# Altium PCB AMDDSP.PcbDoc (part 3 of 3)
Units mil, origin at the board's own origin, x right, y up, seen from the top; angles counter-clockwise.
Board outline 4736.22 x 5330.71 mil, 4 copper layers (Top Layer, GND, PWR, Bottom Layer); 286 components, 168 nets, 1027 pads, 408 vias.
Unrouted connection lines stored in the file: 126.
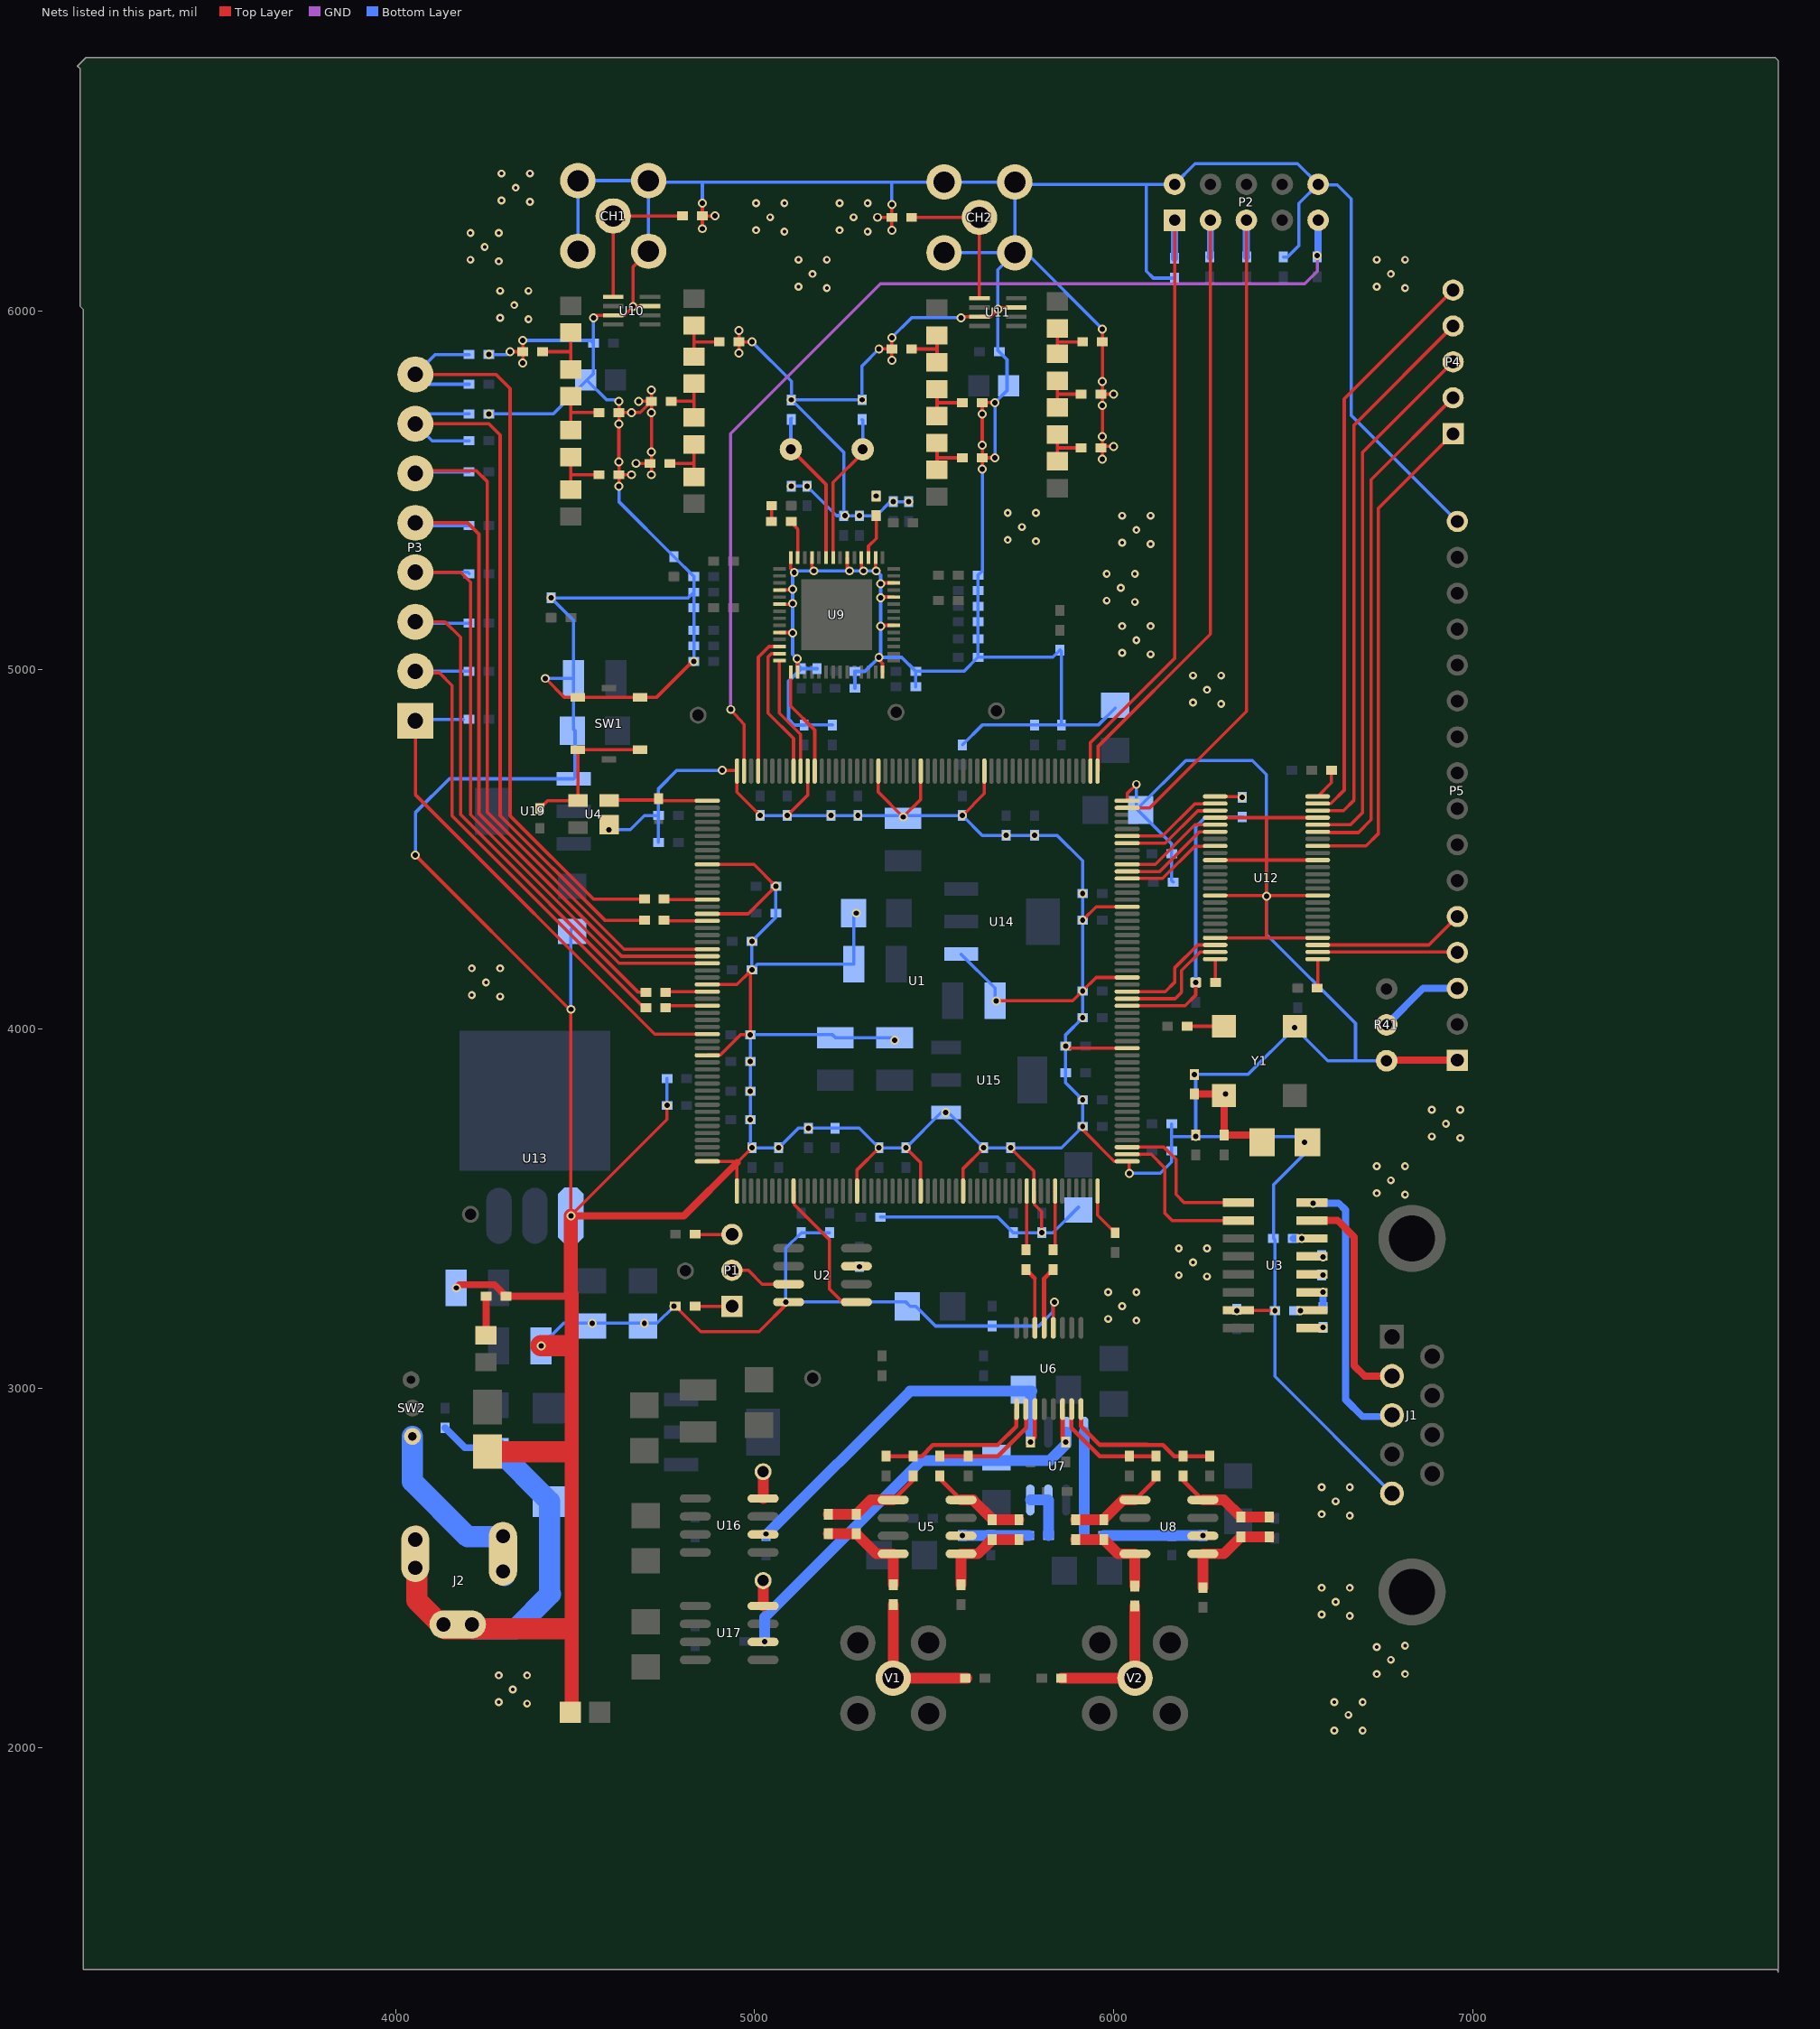
[diagram p5: the nets of this part, all layers, seen from the top]

## Via types
v1: diameter 25, hole 15, Top Layer to Bottom Layer, tented both sides, 261 vias
v2: diameter 22, hole 10, Top Layer to Bottom Layer, tented bottom, 125 vias
v3: diameter 25.98, hole 12.99, Top Layer to Bottom Layer, tented top, 16 vias
v4: diameter 157.48, hole 118.11, Top Layer to Bottom Layer, tented both sides, 4 vias
v5: diameter 39.37, hole 23.62, Top Layer to Bottom Layer, tented both sides, 1 vias
v6: diameter 25, hole 15, Top Layer to Bottom Layer, tented bottom, 1 vias

## Nets (pads, with @x,y where several pads share a name; then routed paths per layer and width w, separated by ;. In a path a pad name is that pad's centre, name@x,y a point inside that pad or via, vN(x,y) a via of type N, cw(c..) or ccw(c..) an arc to the next point about the centre after c; other vN are vias at no path point) (continued)
GND: C1.2 C2.2 C3.2 C4.2 C5.2 C8.2 C9.1 C12.2 C16.2 C18.2 C19.2 C20.2 C21.2 C22.2 C23.2 C24.2 C25.2 C26.2 C27.2 C28.2 C29.2 C30.2 C31.2 C32.2 C33.2 C34.2 C35.2 C36.2 C37.2 C38.2 C40.1 C41.2 C42.2 C43.2 C44.2 C46.2 C47.2 C48.2 C49.2 C50.2 C51.2 C52.2 C53.2 C54.2 C55.2 C56.2 C57.2 C58.2 C59.2 C60.2 C67.2 C68.1 C69.1 C70.1 C71.1 C72.2 C73.2 C74.2 C75.1 C76.1 C77.1 C78.1 C79.1 C80.1 C81.1 C82.1 C83.1 C84.1 C85.1 C86.2 C87.2 C88.2 C90.1 C91.1 C92.1 C93.1 C94.1 C95.1 C96.1 C97.1 C98.1 C99.1 C100.1 C112.2 C113.1 C114.1 C115.1 C116.1 C117.1 C118.1 C119.1 C120.1 C121.1 C122.1 C123.1 C124.1 C125.1 C126.1 C127.1 C128.1 C129.2 C130.2 C131.2 C136.1 C137.1 C138.1 C139.1 C140.1 C141.1 C142.1 C143.1 C144.2 C145.2 C146.2 C162.2 C163.2 C164.2 C165.2 C166.2 C167.2 C168.2 C169.2 CH1.2 CH2.2 D2.1 J1.5 J2.2 J2.2A J2.2B J2.3 J2.3A J2.3B P2.2 P2.10 P5.1 P5.16 R7.1 R8.2 R30.2 R32.2 R33.2 R41.1 R42.1 R43.2 R52.2 R53.2 SW1.B SW1.BB U1.10 U1.17 U1.27 U1.37 U1.52 U1.53 U1.70 U1.79 U1.85 U1.95 U1.105 U1.121 U1.131 U1.141 U1.156 U1.173 U1.182 U1.188 U1.198 U1.208 U2.4 U3.15 U4.1 U6.12 U9.6 U9.10 U9.12 U9.16 U9.18 U9.20 U9.25 U9.28 U9.32 U9.34 U9.38 U9.44 U9.56 U10.3 U10.7 U11.3 U11.7 U12.4 U12.10 U12.15 U12.21 U12.28 U12.34 U12.39 U12.45 U13.1 U14.1 U15.1 U19.1 Y1.2 | length 39700.4
  Top Layer w9: v1(4055.12,4484.25) 4484.25,4055.12 v1(4488.19,4055.12) v1(4488.19,3480.32) 4755.91,3748.03 v1(4755.91,3787.4) ; v1(4318.9,5885.83) C57.2@4354.33,5885.83 ; v1(4354.33,5854.33) C57.2@4354.33,5885.83 ; v1(4354.33,5917.32) C57.2@4354.33,5885.83 ; C57.2@4354.45,5885.83 C57.2@4354.33,5885.83 ; v6(4417.32,4976.38) 4470.48,4923.22 SW1.B@4507.88,4923.22 SW1.BB@4681.1,4923.22 4726.37,4923.22 4826.77,5023.62 v1(4830.71,5023.62) ; v1(4551.18,5980.31) 4558.07,5987.2 U10.3@4606.3,5987.2 4636.81,5987.2 v1(4661.42,6011.81) ; C55.2@4621.93,5543.31 C55.2@4622.05,5543.31 ; v1@4621.93,5578.74 4621.93,5685.04 4622.05,5685.16 C56.2@4622.05,5716.54 ; v1(4622.05,5511.81) C55.2@4622.05,5543.31 ; v1(4622.05,5578.74) C55.2@4622.05,5543.31 ; v1(4622.05,5748.03) C56.2@4622.05,5716.54 ; v1(4657.48,5543.31) C55.2@4622.05,5543.31 ; v1(4669.29,5574.8) C49.2@4708.78,5574.8 ; v1(4677.17,5748.03) C50.2@4712.72,5748.03 ; CH1.2@4704.72,6165.35 4661.42,6122.05 v1(4661.42,6011.81) ; U10.7@4708.66,6012.8 4662.4,6012.8 v1(4661.42,6011.81) ; v1(4712.6,5543.31) v1(4712.6,5606.3) ; v1(4712.6,5779.53) 4712.72,5779.41 C50.2@4712.72,5748.03 ; v1@4712.72,5606.3 C50.2@4712.72,5748.03 ; R7.1@4779.53,3228.35 4850.39,3157.48 5011.81,3157.48 5094.29,3239.96 U2.4@5094.49,3239.96 ; R32.2@4854.21,6263.78 v1(4889.76,6263.78) ; v1(4854.33,6228.35) v1(4854.33,6299.21) ; U1.52@4868.11,3631.89 4954.72,3631.89 ; U1.37@4868.11,3927.17 4869.52,3928.57 4905.21,3928.57 4960.89,3984.25 v1(4988.19,3984.25) v1@4988.19,4161.42 ; U1.27@4868.11,4124.02 4950.79,4124.02 v1@4988.19,4161.42 ; U1.17@4868.11,4320.87 4982.28,4320.87 v1(5059.06,4397.64) 4998.03,4458.66 U1.10@4868.11,4458.66 ; v1(4909.45,4720.47) 4948.82,4720.47 U1.208@4950.79,4718.5 4950.79,4659.45 v1(5015.75,4594.49) ; U1.53@4950.79,3549.21 4950.79,3627.95 4954.72,3631.89 ; C51.2@4956.57,5913.39 C51.2@4956.69,5913.39 ; v1(4956.69,5881.89) C51.2@4956.69,5913.39 ; v1(4956.69,5944.88) C51.2@4956.69,5913.39 ; v1(4992.13,3669.29) 4954.72,3631.89 ; v1(4992.13,4165.35) v1@4988.19,4161.42 ; v1(4992.13,5913.39) C51.2@4956.69,5913.39 ; U9.34@5068.9,5183.07 v1@5104.33,5183.07 ; U9.32@5068.9,5222.44 v1@5104.33,5222.44 ; v1(5090.55,4594.49) 5147.64,4651.57 U1.198@5147.64,4718.5 ; U9.28@5100.39,5312.99 5100.39,5281.5 v1@5110.23,5271.66 ; v1@5110.24,5267.72 v1@5110.24,5271.65 ; U9.25@5159.45,5312.99 5159.45,5281.5 v1(5165.35,5275.59) ; U9.20@5257.87,5312.99 5257.87,5281.5 v1(5263.78,5275.59) ; U1.70@5285.43,3549.21 5285.43,3608.27 v1(5346.46,3669.29) ; U9.18@5297.24,5312.99 5297.24,5281.5 v1(5303.15,5275.59) ; v1@5336.61,5277.56 U9.16@5336.61,5312.99 ; v1(5342.52,6259.84) R33.2@5381.89,6259.84 ; U1.188@5344.49,4718.5 5344.49,4659.45 v1(5413.39,4590.55) 5462.6,4639.76 U1.182@5462.6,4718.5 ; v1(5346.46,5893.7) C60.2@5381.89,5893.7 ; v1(5381.89,5862.2) C60.2@5381.89,5893.7 ; v1(5381.89,5925.2) C60.2@5381.89,5893.7 ; v1(5381.89,6224.41) R33.2@5381.89,6259.84 ; v1(5381.89,6295.28) R33.2@5381.89,6259.84 ; C60.2@5382.01,5893.7 C60.2@5381.89,5893.7 ; R33.2@5382.01,6259.84 R33.2@5381.89,6259.84 ; v1(5421.26,3669.29) 5462.6,3627.95 U1.79@5462.6,3549.21 ; v1(5578.74,4594.49) 5639.76,4655.51 U1.173@5639.76,4718.5 ; U1.85@5580.71,3549.21 5580.71,3612.2 v1(5637.8,3669.29) ; C58.2@5633.74,5590.55 C58.2@5633.86,5590.55 ; v1@5633.74,5625.98 C59.2@5633.74,5744.09 v1(5669.29,5744.09) ; v1(5633.86,5559.06) C58.2@5633.86,5590.55 ; v1(5633.86,5625.98) C58.2@5633.86,5590.55 ; v1(5669.29,5590.55) C58.2@5633.86,5590.55 ; v1(5673.23,4078.74) 5885.83,4078.74 v1(5913.39,4106.3) 5950.79,4143.7 U1.131@6037.4,4143.7 ; v1(5712.6,3669.29) 5777.56,3604.33 U1.95@5777.56,3549.21 5778.96,3547.81 5778.96,3512.11 5799.21,3491.87 v1(5799.21,3433.07) ; U6.12@5831.69,3168.31 5831.69,3237.2 v1(5834.65,3240.16) ; v1(5866.14,3952.76) 5872.05,3946.85 U1.121@6037.4,3946.85 ; v1(5913.39,3728.35) 5913.39,3720.21 6001.71,3631.89 U1.105@6037.4,3631.89 ; v1(5913.39,4303.15) 5950.79,4340.55 U1.141@6037.4,4340.55 ; C52.2@5964.45,5622.05 C52.2@5968.5,5622.05 ; C53.2@5964.45,5767.72 C53.2@5968.39,5767.72 ; v1@5968.39,5657.48 C53.2@5968.39,5767.72 ; v1@5968.5,5590.55 C52.2@5968.5,5622.05 ; v1(5968.5,5649.61) C52.2@5968.5,5622.05 ; v1(5968.5,5948.82) 5968.5,5913.5 C54.2@5968.39,5913.39 C53.2@5968.39,5767.72 ; v1(6000,5622.05) C52.2@5968.5,5622.05 ; v1(6000,5767.72) C53.2@5968.39,5767.72 ; U1.156@6037.4,4635.83 6037.4,4655.51 v1(6062.99,4681.1) ; v1(6043.31,3598.43) U1.105@6043.31,3625.98 ; U12.45@6282.48,4253.94 6425.18,4253.94 ; U12.39@6282.48,4372.05 v1@6425.18,4372.05 ; U12.34@6282.48,4470.47 6425.18,4470.47 ; U12.28@6282.48,4588.58 6425.2,4588.58 U12.21@6567.91,4588.58 ; U3.15@6346.85,3217.2 6448.15,3217.2 v1(6448.82,3216.54) ; 6425.18,4588.57 6425.18,4470.47 ; U12.4@6567.91,4253.94 6425.18,4253.94 ; U12.10@6567.91,4372.05 v1@6425.18,4372.05 ; U12.15@6567.91,4470.47 6425.18,4470.47 ; C56.2@4622.05,5716.54 4681.22,5716.54 C50.2@4712.72,5748.03 ; v1@5110.23,5271.66 5110.23,5275.07 v1@5110.24,5271.65 ; 6425.18,4253.94 v1@6425.18,4372.05 ; v1@6425.18,4372.05 6425.18,4470.47
  Top Layer w10: U9.38@5068.9,5104.33 v1@5104.33,5104.33 ; U9.44@5120.08,4994.09 v1@5120.08,5029.53 ; v1@5346.46,5027.56 5356.08,5017.94 5356.08,5002.21 5356.3,5001.99 U9.56@5356.3,4994.09 ; v1@5352.36,5124.02 U9.6@5387.8,5124.02 ; v1@5352.36,5202.76 U9.10@5387.8,5202.76 ; v1@5352.36,5242.13 U9.12@5387.8,5242.13 ; v1@5573.82,5983.27 U11.3@5625.98,5983.27 ; U11.3@5633.86,5983.27 U11.3@5625.98,5983.27 ; v1@5676.95,6004.16 5657.04,5984.25 5626.97,5984.25 U11.3@5625.98,5983.27 ; v1@5680.66,6007.87 U11.7@5728.35,6007.87
  Top Layer w19.68: v1(4169.29,3279.53) 4178.01,3288.25 4275.31,3288.25 4307.09,3256.47 R42.1@4307.09,3255.91 4480.31,3255.91 4488.19,3263.78 ; R41.1@6759.84,3911.81 6761.42,3913.39 P5.1@6956.69,3913.39
  Top Layer w20: v1(4488.19,3480.32) 4803.15,3480.32 4950.79,3627.95
  Top Layer w39.37: 4488.19,3263.78 v1(4488.19,3480.32) ; R43.2@4490.16,2098.43 4490.16,3261.81
  Top Layer w59.06: J2.2B@4059.06,2587.6 J2.2B@4059.06,2566.93 ; D2.1@4255.91,2823.82 4467.52,2823.82 4468.5,2822.83 ; v1(4405.51,3118.11) 4468.5,3118.11 ; 4476.38,2330.71 4216.54,2330.71 4177.17,2330.71 4137.8,2330.71 4059.06,2409.45 4059.06,2488.19 J2.2A@4059.06,2527.56 ; J2.2A@4059.06,2527.56 J2.2B@4059.06,2566.93 ; J2.2A@4059.06,2527.56 J2.2B@4059.06,2566.93
  Bottom Layer w9: v1(4055.12,4484.25) 4055.12,4602.36 4149.61,4696.85 U19.1@4496.06,4696.85 4500,4700.79 4500,4830.71 4496.06,4834.65 C169.2@4496.06,4976.38 ; R53.2@4259.72,5712.6 v1(4259.84,5712.6) 4438.98,5712.6 C166.2@4533.46,5807.09 ; R52.2@4259.72,5877.95 v1(4259.84,5877.95) 4311.02,5877.95 v1(4318.9,5885.83) ; v1(4354.33,5917.32) 4543.43,5917.32 C165.2@4551.3,5909.45 ; v1(4405.51,3118.11) 4468.5,3181.1 v1(4547.24,3181.1) 4688.98,3181.1 v1(4692.91,3181.1) 4728.35,3181.1 v1(4775.59,3228.35) ; v6(4417.32,4976.38) C169.2@4496.06,4976.38 ; v1(4488.19,4055.12) 4488.19,4275.59 C167.2@4492.13,4279.53 ; CH1.2@4507.87,6165.35 CH1.2@4507.87,6362.2 CH1.2@4704.72,6362.2 ; v1(4551.18,5980.31) 4551.3,5980.2 C165.2@4551.3,5909.45 ; v1(4594.49,4555.12) 4653.54,4555.12 4692.91,4594.49 C114.1@4732.28,4594.49 ; v1(4622.05,5511.81) 4622.05,5468.39 C43.2@4775.59,5314.84 4775.83,5314.84 C33.2@4830.83,5259.84 C32.2@4830.83,5216.54 ; v1(4622.05,5748.03) 4618.11,5751.97 4587.76,5751.97 4533.46,5806.27 C166.2@4533.46,5807.09 ; CH1.2@4704.72,6165.35 CH1.2@4704.72,6362.2 ; C113.1@4732.28,4519.69 C114.1@4732.28,4594.49 ; v1(4755.91,3787.4) C115.1@4755.91,3862.2 ; C29.2@4830.83,5023.62 C28.2@4830.83,5066.93 C30.2@4830.83,5110.24 C31.2@4830.83,5173.23 C32.2@4830.83,5216.54 ; v1(4854.33,6299.21) 4854.33,6358.27 ; v1(4909.45,4720.47) 4783.46,4720.47 4732.28,4669.29 C114.1@4732.28,4594.49 ; v1(4992.13,5913.39) 5102.36,5803.15 v1(5102.36,5751.97) C48.2@5102.36,5751.85 ; v1(5015.75,4594.49) v1(5090.55,4594.49) v1(5212.6,4594.49) v1(5287.4,4594.49) 5405.51,4594.49 C129.2@5413.39,4586.61 5421.26,4594.49 v1(5578.74,4594.49) 5633.86,4539.37 5842.52,4539.37 5913.39,4468.5 v1(5913.39,4031.5) 5866.14,3984.25 5866.14,3850.39 v1(5913.39,3803.15) v1(5913.39,3728.35) 5854.33,3669.29 v1(5637.8,3669.29) 5538.98,3768.11 5520.08,3768.11 v1(5421.26,3669.29) v1(5346.46,3669.29) 5291.34,3724.41 5122.05,3724.41 v1(5066.93,3669.29) v1(4992.13,3669.29) 4988.19,3673.23 v1(4988.19,3748.03) v1(4988.19,3826.77) v1(4988.19,3909.45) v1(4988.19,3984.25) 5216.54,3984.25 C145.2@5224.41,3976.38 C146.2@5389.76,3976.38 ; v1(5059.06,4397.64) C136.1@5059.06,4322.83 5059.06,4311.02 v1(4992.13,4244.09) v1(4992.13,4165.35) 5007.87,4181.1 C131.2@5275.59,4181.1 5275.59,4314.96 v1(5283.46,4322.83) ; C35.2@5102.36,5511.69 C34.2@5145.67,5511.69 5228.35,5429.02 ; C127.1@5137.8,4846.46 C128.1@5216.54,4846.46 ; C117.1@5208.66,3433.07 C118.1@5129.92,3433.07 5086.61,3389.76 v1(5086.61,3240.16) 5421.26,3240.16 5433.07,3228.35 5448.82,3228.35 5503.94,3173.23 C85.1@5661.42,3173.23 5791.34,3173.23 5830.71,3212.6 5830.71,3236.22 v1(5834.65,3240.16) ; C37.2@5291.34,5429.02 C36.2@5248.03,5429.02 5248.03,5606.18 C48.2@5102.36,5751.85 ; C37.2@5291.57,5429.25 R30.2@5338.58,5429.25 C38.2@5377.72,5468.39 ; v1(5346.46,5893.7) 5299.21,5846.46 v1(5299.21,5751.97) 5102.48,5751.97 C48.2@5102.36,5751.85 ; C1.2@5350.28,3476.38 5677.17,3476.38 C119.1@5720.47,3433.07 v1(5799.21,3433.07) 5830.71,3433.07 C73.2@5901.57,3503.94 ; v1(5381.89,5925.2) 5437.01,5980.31 v1(5574.8,5980.31) ; v1(5381.89,6295.28) 5381.89,6358.27 ; C38.2@5385.83,5468.39 C41.2@5429.13,5468.39 ; C24.2@5448.7,4952.76 C25.2@5448.7,4996.06 5582.56,4996.06 C23.2@5621.93,5035.43 ; CH2.2@5527.56,6161.42 CH2.2@5724.41,6161.42 ; U14.1@5574.8,4208.66 5669.29,4114.17 C144.2@5669.29,4078.74 ; C95.1@5578.74,4791.34 5633.86,4846.46 C125.1@5779.53,4846.46 C126.1@5854.33,4846.46 ; v1(5633.86,5559.06) 5633.86,5275.71 C18.2@5621.93,5263.78 C19.2@5621.93,5220.47 C20.2@5621.93,5177.17 C21.2@5621.93,5133.86 C22.2@5621.93,5086.61 C23.2@5621.93,5035.43 ; v1(5669.29,5590.55) v1(5669.29,5744.09) 5702.76,5777.56 5702.76,5791.34 5702.76,5864.06 C163.2@5680.98,5885.83 5677.17,5889.65 v1(5677.17,6003.94) 5677.17,6114.17 CH2.2@5724.41,6161.42 ; v1(5968.5,5948.82) 5755.91,6161.42 CH2.2@5724.41,6161.42 ; C112.2@6003.94,4893.7 5956.69,4846.46 C126.1@5854.33,4846.46 ; v1(6043.31,3598.43) 6129.92,3598.43 6161.42,3629.92 C122.1@6161.42,3661.42 6161.42,3696.85 6165.35,3700.79 v1(6228.35,3700.79) ; v1(6062.99,4681.1) 6062.99,4614.17 C74.2@6066.93,4610.24 ; C122.1@6161.42,3665.35 C121.1@6161.42,3736.22 ; C124.1@6165.35,4409.45 6161.42,4413.39 C123.1@6161.42,4488.19 6161.42,4515.75 C74.2@6066.93,4610.24 ; R8.2@6169.29,6090.67 6110.12,6090.67 6090.55,6110.24 6090.55,6351.97 ; v1(6224.41,3874.02) 6374.02,3874.02 v1(6503.94,4003.94) 6596.06,3911.81 6669.29,3911.81 ; v1@6228.35,3870.08 v1(6228.35,3700.79) ; C100.1@6472.44,6149.61 6484.25,6149.61 6515.75,6181.1 6515.75,6298.43 P2.10@6569.29,6351.97 ; 6661.42,6086.61 6661.42,6098.41 ; R41.1@6759.84,3911.81 6669.29,3911.81 ; J1.5@6774.8,2707.09 6448.94,3032.95 C8.2@6448.94,3216.54 6448.94,3413.27 C9.1@6444.88,3417.32 6444.88,3566.93 6531.5,3653.54 v1(6531.5,3685.04) 6515.75,3700.79 v1(6228.35,3700.79) ; P5.16@6956.69,5413.39 6661.42,5708.66 6661.42,6098.41 ; C169.2@4496.06,4976.38 4496.06,5137.68 C42.2@4433.07,5200.67 4814.96,5200.67 C32.2@4830.83,5216.54 ; C166.2@4533.46,5807.09 4551.3,5824.92 C165.2@4551.3,5909.45 ; CH1.2@4704.72,6362.2 4708.66,6358.27 4854.33,6358.27 ; 4854.33,6358.27 5381.89,6358.27 ; 5381.89,6358.27 CH2.2@5527.56,6358.27 CH2.2@5724.41,6358.27 ; C23.2@5621.93,5035.43 5830.59,5035.43 C44.2@5850.39,5055.24 5854.33,5051.3 C126.1@5854.33,4846.46 ; CH2.2@5724.41,6161.42 CH2.2@5724.41,6358.27 ; CH2.2@5724.41,6358.27 5730.71,6351.97 6086.61,6351.97 6090.55,6351.97 ; C74.2@6066.93,4610.24 6066.93,4614.17 6200.79,4748.03 6385.83,4748.03 6425.2,4708.66 v1(6425.2,4370.08) 6425.2,4263.78 6673.23,4015.75 6673.23,3915.75 6669.29,3911.81 ; 6090.55,6351.97 P2.2@6169.29,6351.97 6226.77,6409.45 6511.81,6409.45 P2.10@6569.29,6351.97 ; P2.10@6569.29,6351.97 6570.87,6350.39 6622.05,6350.39 6661.42,6311.02 6661.42,6098.41
  Bottom Layer w10: C127.1@5137.8,4846.46 5110.24,4846.46 5094.49,4862.2 5094.49,4968.39 C27.2@5129.92,5003.82 ; C26.2@5173.23,5003.82 C27.2@5129.92,5003.82 ; 5228.35,5429.02 C36.2@5248.03,5429.02 ; C47.2@5279.41,4948.82 C46.2@5279.41,4996.06 5307.09,4996.06 v1(5346.46,5035.43) ; C37.2@5291.34,5429.02 C37.2@5291.57,5429.25 ; C38.2@5377.72,5468.39 C38.2@5385.83,5468.39 ; C25.2@5448.7,4996.06 5409.33,5035.43 v1(5346.46,5035.43) ; C27.2@5129.92,5003.82 5118.11,5015.63 v1(5118.11,5031.5) 5106.3,5043.31 v1(5106.3,5102.36) v1(5106.3,5185.04) v1(5106.3,5224.41) 5106.3,5263.78 5118.11,5275.59 v1(5165.35,5275.59) v1(5263.78,5275.59) v1(5303.15,5275.59) v1(5338.58,5275.59) 5350.39,5263.78 v1(5350.39,5240.16) v1(5350.39,5200.79) v1(5350.39,5122.05) 5350.39,5039.37 v1(5346.46,5035.43)
  Bottom Layer w19.68: C162.2@4137.8,2889.88 4193.03,2834.65 C67.2@4275.59,2834.65
  Bottom Layer w59.06: J2.3B@4216.54,2330.71 4334.65,2330.71 4431.1,2427.17 4429.13,2429.13 C16.2@4429.13,2684.65 4279.13,2834.65 C67.2@4275.59,2834.65
  other v1: 6342.52,3216.54 5149.61,3724.41 5531.5,3767.72 5389.76,3968.5 5913.39,4377.95 5700.79,4539.37 5779.53,4539.37 4433.07,5200.79 5110.23,5271.64 5251.97,5429.13 5291.34,5429.13 5385.83,5468.5 5429.13,5468.5 5102.36,5511.81 5145.67,5511.81 5968.5,5586.61 4622.05,5685.04 5633.86,5712.6 4657.48,5716.54 4712.6,5716.54 5968.5,5736.22 5968.5,5803.15
  other v2: 6614.17,2047.24 6692.91,2047.24 6653.54,2090.55 4366.14,2122.05 4287.4,2125.98 6614.17,2125.98 6692.91,2125.98 4326.77,2161.42 4287.4,2200.79 4366.14,2200.79 6732.28,2204.72 6811.02,2204.72 6771.65,2244.09 6732.28,2279.53 6811.02,2283.46 6657.48,2366.14 6578.74,2370.08 6618.11,2405.51 6578.74,2444.88 6657.48,2444.88 6657.48,2645.67 6578.74,2649.61 6618.11,2685.04 6578.74,2724.41 6657.48,2724.41 6062.99,3188.98 5984.25,3192.91 6023.62,3228.35 5984.25,3267.72 6062.99,3267.72 6259.84,3311.02 6181.1,3314.96 6220.47,3350.39 6181.1,3389.76 6259.84,3389.76 6811.02,3539.37 6732.28,3543.31 6771.65,3578.74 6732.28,3618.11 6811.02,3618.11 6964.57,3696.85 6885.83,3700.79 6925.2,3736.22 6885.83,3775.59 6964.57,3775.59 4291.34,4090.55 4212.6,4094.49 4251.97,4129.92 4212.6,4169.29 4291.34,4169.29 6299.21,4905.51 6220.47,4909.45 6259.84,4944.88 6220.47,4984.25 6299.21,4984.25 6102.36,5043.31 6023.62,5047.24 6062.99,5082.68 6023.62,5122.05 6102.36,5122.05 6059.06,5188.98 5980.31,5192.91 6019.69,5228.35 5980.31,5267.72 6059.06,5267.72 6102.36,5350.39 6023.62,5354.33 5783.46,5358.27 5704.72,5362.2 6062.99,5389.76 5744.09,5397.64 6023.62,5429.13 6102.36,5429.13 5704.72,5437.01 5783.46,5437.01 4370.08,5976.38 4291.34,5980.31 4330.71,6015.75 4291.34,6055.12 4370.08,6055.12 5200.79,6062.99 6811.02,6062.99 5122.05,6066.93 6732.28,6066.93 5161.42,6102.36 6771.65,6102.36 4287.4,6137.8 4208.66,6141.73 5122.05,6141.73 5200.79,6141.73 6732.28,6141.73 6811.02,6141.73 4248.03,6177.17 4208.66,6216.54 4287.4,6216.54 5082.68,6220.47 5314.96,6220.47 5003.94,6224.41 5236.22,6224.41 5043.31,6259.84 5275.59,6259.84 5003.94,6299.21 5082.68,6299.21 5236.22,6299.21 5314.96,6299.21 4374.02,6303.15 4295.28,6307.09 4334.65,6342.52 4295.28,6381.89 4374.02,6381.89
MESOUT: CH1.1 R32.1 U10.1 | length 418.3
  Top Layer w9: U10.1@4606.3,6038.39 CH1.1@4606.3,6263.78 R32.1@4799.21,6263.78
MISO: P3.3 R49.2 R55.2 | length 1515
  Top Layer w9: P3.3@4059.06,5137.8 P3.3@4055.12,5133.86 4137.8,5133.86 4181.1,5090.55 4181.1,4597.29 4676.03,4102.36 R55.2@4696.97,4102.36
  Bottom Layer w9: P3.3@4055.12,5133.86 4059.06,5129.92 R49.2@4204.84,5129.92
MOSI: P3.2 R50.2 R54.2 | length 1392.2
  Top Layer w9: P3.2@4055.12,4996.06 4059.06,4992.13 4122.05,4992.13 4157.48,4956.69 4157.48,4593.84 4692.27,4059.06 R54.2@4696.97,4059.06
  Bottom Layer w9: P3.2@4055.12,4996.06 R50.2@4204.84,4996.06
MOSI_FLASH: U1.61 U2.5 | length 405
  Top Layer w9: U1.61@5108.27,3549.21 5109.67,3547.81 5109.67,3512.11 5208.66,3413.13 5208.66,3275.59 5244.29,3239.96 U2.5@5283.46,3239.96 U2.5@5283.27,3240.16
NetC3_1: C3.1 C4.1 R2.2 Y1.4 | length 316.9
  Top Layer w20: C3.1@6224.41,3818.9 6303.15,3818.9 Y1.4@6307.09,3814.96 R2.2@6307.09,3704.61 6401.69,3704.61 C4.1@6421.26,3685.04
  other v1: 6311.02,3818.9
NetC6_1: C6.1 U3.4
  other v1: 6582.68,3314.96
NetC6_2: C6.2 U3.5
  other v1: 6582.68,3366.14
NetC7_1: C7.1 U3.3 | length 43.3
  Bottom Layer w20: C7.1@6582.68,3224.41 v1(6582.68,3267.72)
NetC7_2: C7.2 U3.1
  other v1: 6582.68,3169.29
NetC8_1: C8.1 U3.2
  other v1: 6519.69,3216.54
NetC9_2: C9.2 U3.6 | length 23.7
  Bottom Layer w20: C9.2@6499.88,3417.32 v1(6523.62,3417.32)
NetC10_1: C10.1 RS1.1 U6.1 | length 443.2
  Top Layer w11.81: C10.1@5366.14,2811.02 RS1.1@5440.94,2811.02 5465.75,2811.02 5496.66,2841.93 5677.23,2841.93 ; 5677.38,2842.74 5728.35,2893.7 U6.1@5728.35,2940.94
NetC11_1: C11.1 RS2.1 U6.2 | length 368.7
  Top Layer w11.81: RS2.1@5515.75,2811.02 5677.17,2811.02 5755.91,2889.76 5755.91,2901.82 5755.91,2907.85 5755.91,2919.91 5755.91,2925.94 5755.91,2937.99 5755.91,2963.58 5755.91,2942.91 U6.2@5754.92,2941.93
NetC13_1: C13.1 R16.2 R17.2 U5.2 | length 185.2
  Bottom Layer w30: v1(5578.74,2590.55) R17.2@5657.48,2590.55 ; R17.2@5657.48,2590.43 5763.78,2590.43 R16.2@5763.9,2590.55
NetC14_1: C14.1 RS3.1 U6.7 | length 350.9
  Top Layer w11.81: U6.7@5882.87,2941.93 5881.89,2942.91 5881.89,2956.69 5881.89,2889.76 5960.63,2811.02 RS3.1@6118.11,2811.02
NetC15_1: C15.1 RS4.1 U6.8 | length 447.1
  Top Layer w11.81: U6.8@5908.46,2941.93 U6.8@5909.45,2940.94 ; U6.8@5909.12,2944.88 5909.12,2894.03 5960.63,2842.52 6092.7,2842.52 ; 6090.55,2841.93 6137.2,2841.93 6168.1,2811.02 RS4.1@6192.91,2811.02 C15.1@6267.72,2811.02
NetC17_1: C17.1 R19.2 R20.2 U8.2 | length 295.9
  Bottom Layer w30: R19.2@5972.32,2590.55 6062.99,2590.55 ; 6043.19,2590.55 6062.99,2590.55 ; C17.1@6247.91,2590.43 C17.1@6247.97,2590.49 ; C17.1@6248.03,2590.43 C17.1@6247.97,2590.49 ; 6062.99,2590.55 6153.43,2590.55 6153.54,2590.43 6153.66,2590.55 C17.1@6247.91,2590.55 ; C17.1@6247.91,2590.55 v1(6248.03,2590.55) C17.1@6247.97,2590.49 ; C17.1@6247.91,2590.55 C17.1@6247.97,2590.49
NetC39_2: C39.2 R29.1 | length 43.4
  Top Layer w9: R29.1@5047.24,5413.39 5047.36,5413.5 C39.2@5047.36,5456.69
NetC40_2: C40.2 U9.22 Y2.2 | length 418.7
  Top Layer w9: U9.22@5218.5,5312.99 5218.5,5521.65 5300.79,5603.94 Y2.2@5300.79,5614.17
  Bottom Layer w9: C40.2@5299.21,5696.97 5300.79,5695.39 Y2.2@5300.79,5614.17
NetC48_1: C48.1 U9.23 Y2.1 | length 429.1
  Top Layer w9: Y2.1@5100.79,5614.17 5198.82,5516.14 U9.23@5198.82,5312.99
  Bottom Layer w9: Y2.1@5100.79,5614.17 5100.79,5699.21 C48.1@5102.36,5700.79
NetC49_1: C49.1 L1.2 L2.1 | length 163
  Top Layer w9: C49.1@4763.78,5574.8 4830.71,5574.8 ; 4826.77,5574.8 4830.71,5578.74 ; L1.2@4830.71,5537.4 4830.71,5578.74 ; L2.1@4830.71,5627.95 4830.71,5578.74
NetC50_1: C50.1 L2.2 L3.1 | length 159.1
  Top Layer w9: C50.1@4767.72,5748.03 4826.77,5748.03 4830.71,5744.09 ; L2.2@4830.71,5702.76 4830.71,5744.09 ; L3.1@4830.71,5797.24 4830.71,5744.09
NetC51_1: C51.1 L3.2 L4.1 | length 157.5
  Top Layer w9: L3.2@4830.71,5872.05 4830.71,5913.39 ; L4.1@4830.71,5958.66 4830.71,5913.39 ; C51.1@4901.57,5913.39 4830.71,5913.39
NetC52_1: C52.1 L5.2 L6.1 | length 143.4
  Top Layer w9: L5.2@5842.52,5580.71 5842.52,5618.11 ; L6.1@5842.52,5655.51 5842.52,5618.11 ; C52.1@5909.45,5622.05 5905.51,5618.11 5842.52,5618.11
NetC53_1: C53.1 L6.2 L7.1 | length 141.7
  Top Layer w9: L6.2@5842.52,5730.31 5842.52,5767.72 ; L7.1@5842.52,5805.12 5842.52,5767.72 ; C53.1@5909.45,5767.72 5842.52,5767.72
NetC54_1: C54.1 L7.2 L8.1 | length 141.7
  Top Layer w9: L7.2@5842.52,5879.92 5842.52,5913.39 ; L8.1@5842.52,5950.79 5842.52,5913.39 ; C54.1@5913.39,5913.39 5842.52,5913.39
NetC55_1: C55.1 L9.2 L10.1 | length 169.3
  Top Layer w9: L9.2@4488.19,5501.97 4488.19,5543.31 ; L10.1@4488.19,5592.52 4488.19,5543.31 ; C55.1@4566.93,5543.31 4488.19,5543.31
NetC56_1: C56.1 L10.2 L11.1 | length 173.2
  Top Layer w9: L10.2@4488.19,5667.32 4488.19,5716.54 ; L11.1@4488.19,5761.81 4488.19,5716.54 ; C56.1@4566.93,5716.54 4488.19,5716.54
NetC57_1: C57.1 L11.2 L12.1 | length 182.7
  Top Layer w9: C57.1@4409.45,5885.83 4484.25,5885.83 4488.19,5889.76 ; L11.2@4488.19,5836.61 4488.19,5889.76 ; L12.1@4488.19,5938.98 4488.19,5889.76
NetC58_1: C58.1 L13.2 L14.1 | length 145.7
  Top Layer w10: L13.2@5507.87,5557.09 5507.87,5590.55 ; L14.1@5507.87,5631.89 5507.87,5590.55 ; C58.1@5578.74,5590.55 5507.87,5590.55
NetC59_1: C59.1 L14.2 L15.1 | length 145.7
  Top Layer w10: L14.2@5507.87,5706.69 5507.87,5744.09 ; L15.1@5507.87,5781.5 5507.87,5744.09 ; C59.1@5578.74,5744.09 5507.87,5744.09
NetC60_1: C60.1 L15.2 L16.1 | length 145.7
  Top Layer w10: C60.1@5437.01,5893.7 5507.87,5893.7 ; L15.2@5507.87,5856.3 5507.87,5893.7 ; L16.1@5507.87,5931.1 5507.87,5893.7
NetCF1_1: CF1.1 RF1.1 RS1.2 U5.5 | length 314.9
  Top Layer w11.81: U5.5@5385.83,2689.17 5440.94,2744.29 RS1.2@5440.94,2756.02
  Top Layer w15.75: U5.5@5385.83,2689.17 U5.5@5413.58,2689.17
  Top Layer w30: CF1.1@5204.72,2649.61 RF1.1@5283.46,2649.61 5323.03,2689.17 U5.5@5385.83,2689.17
NetCF1_2: CF1.2 RF1.2 RG1.1 U5.8 | length 290.5
  Top Layer w30: CF1.2@5204.72,2594.61 RF1.2@5283.46,2594.61 5338.9,2539.17 U5.8@5385.83,2539.17 RG1.1@5385.83,2452.76
NetCF2_1: CF2.1 RF2.1 RS2.2 U5.4 | length 300.8
  Top Layer w11.81: RS2.2@5515.75,2756.02 5515.75,2748.23 U5.4@5574.8,2689.17
  Top Layer w15.75: U5.4@5550.98,2689.17 U5.4@5574.8,2689.17
  Top Layer w30: U5.4@5574.8,2689.17 5608.36,2689.17 5661.42,2636.11 RF2.1@5661.42,2633.86 CF2.1@5736.22,2633.86
NetCF2_2: CF2.2 RF2.2 RG3.1 U5.1 | length 264.3
  Top Layer w30: RG3.1@5574.8,2452.76 U5.1@5574.8,2539.17 5621.73,2539.17 RF2.2@5661.42,2578.86 CF2.2@5736.22,2578.86
NetCF3_1: CF3.1 RF3.1 RS3.2 U8.5 | length 280.9
  Top Layer w11.81: U8.5@6059.06,2689.17 6118.11,2748.23 RS3.2@6118.11,2756.02
  Top Layer w30: CF3.1@5893.7,2633.86 RF3.1@5972.44,2633.86 5972.44,2636.11 6025.5,2689.17 U8.5@6059.06,2689.17
NetCF3_2: CF3.2 RF3.2 RG4.1 U8.8 | length 272.1
  Top Layer w30: CF3.2@5893.7,2578.86 RF3.2@5972.44,2578.86 6012.13,2539.17 U8.8@6059.06,2539.17 RG4.1@6059.06,2448.82
NetCF4_1: CF4.1 RF4.1 RS4.2 U8.4 | length 294.4
  Top Layer w11.81: RS4.2@6192.91,2756.02 6192.91,2744.29 U8.4@6248.03,2689.17
  Top Layer w30: U8.4@6248.03,2689.17 6306.89,2689.17 RF4.1@6354.33,2641.73 CF4.1@6433.07,2641.73
NetCF4_2: CF4.2 RF4.2 RG6.1 U8.1 | length 299
  Top Layer w30: RG6.1@6248.03,2444.88 U8.1@6248.03,2539.17 6306.77,2539.17 RF4.2@6354.33,2586.73 CF4.2@6433.07,2586.73
NetD1_2: D1.2 R42.2 | length 108.3
  Top Layer w19.68: D1.2@4251.97,3147.64 4252.09,3147.76 R42.2@4252.09,3255.91
NetJ2_1: J2.1 J2.1A J2.1B SW2.1 | length 646.4
  Bottom Layer w59.06: SW2.1@4047.24,2866.14 4047.24,2740.16 4200.79,2586.61 4293.31,2586.61 J2.1B@4303.15,2576.77 ; J2.1A@4303.15,2478.35 J2.1@4303.15,2527.56 ; J2.1@4303.15,2527.56 J2.1B@4303.15,2576.77 ; J2.1@4303.15,2527.56 J2.1B@4303.15,2576.77 ; J2.1@4303.15,2527.56 J2.1B@4303.15,2576.77
NetP1_1: P1.1 R7.2 | length 102.5
  Top Layer w9: R7.2@4834.53,3228.35 P1.1@4937.01,3228.35
NetP1_2: P1.2 U2.3 | length 173.4
  Top Layer w9: P1.2@4937.01,3328.35 4982.68,3328.35 5021.06,3289.96 U2.3@5094.49,3289.96
NetP1_3: P1.3 R1.1 | length 102.4
  Top Layer w9: R1.1@4834.65,3428.35 P1.3@4937.01,3428.35
NetR3_1: R3.1 Y1.3 | length 102.4
  Top Layer w9: R3.1@6204.72,4007.87 Y1.3@6307.09,4007.87
NetR4_1: R4.1 U2.7
  other v1: 5291.34,3338.58
NetR12_1: R12.1 SW1.A SW1.AA U4.3 | length 430.5
  Top Layer w9: R12.1@4401.57,4614.17 4423.48,4636.08 U4.3@4508.19,4636.08 4508.19,4777.25 SW1.A@4507.88,4777.56 SW1.AA@4681.1,4777.56
NetR13_2: R13.2 U1.1 U4.2 | length 274.7
  Top Layer w9: U4.2@4594.8,4636.08 4596.4,4637.68 4732.28,4637.68 4734.13,4635.83 U1.1@4868.11,4635.83
NetR14_2: R14.2 U1.104 | length 136.6
  Top Layer w9: U1.104@5954.72,3549.21 5954.72,3482.17 R14.2@6003.94,3432.95
NetR15_1: R15.1 U6.14 | length 172.6
  Top Layer w9: U6.14@5780.51,3168.31 5780.51,3306.1
  Top Layer w11.81: R15.1@5755.91,3330.71 5780.51,3306.1
NetR16_1: R16.1 U7.7 U7.8 | length 147
  Bottom Layer w30: U7.8@5767.52,2688.98 U7.7@5817.52,2688.98 ; R16.1@5818.9,2590.55 U7.7@5818.9,2687.6
NetR18_1: R18.1 U6.13 | length 172.6
  Top Layer w11.81: U6.13@5806.1,3168.31 5806.1,3306.1 R18.1@5830.71,3330.71
NetR19_1: R19.1 U7.4 U7.5 | length 287.5
  Bottom Layer w30: R19.1@5917.32,2590.55 5917.32,2688.78 U7.5@5917.52,2688.98 U7.4@5917.52,2877.95
NetR29_2: R29.2 U9.27 | length 103.8
  Top Layer w9: R29.2@5102.36,5409.45 5120.08,5391.73 U9.27@5120.08,5312.99
NetR30_1: R30.1 R31.2
  other v1: 5338.58,5484.25
NetR31_1: R31.1 U9.17 | length 125.1
  Top Layer w9: U9.17@5316.93,5312.99 5316.93,5344.49 5338.58,5366.14 R31.1@5338.58,5429.13
NetR37_2: R37.2 U12.48 | length 65.3
  Top Layer w9: U12.48@6282.48,4194.88 6282.48,4130.79 R37.2@6283.35,4129.92
NetR38_2: R38.2 U12.1 | length 81.2
  Top Layer w9: R38.2@6566.81,4114.17 6567.91,4115.28 U12.1@6567.91,4194.88
NetR39_2: R39.2 U12.25 | length 76.6
  Top Layer w9: U12.25@6282.48,4647.64 6356.3,4647.64 v1(6358.27,4645.67)
NetR40_2: R40.2 U12.24 | length 88.7
  Top Layer w9: U12.24@6567.91,4647.64 6606.18,4685.91 R40.2@6606.18,4720.47
NetR44_1: R44.1 RG1.2 V1.1 | length 409.6
  Top Layer w30: RG1.2@5385.83,2397.76 V1.1@5385.83,2192.91 R44.1@5590.55,2192.91
NetR45_1: R45.1 RG4.2 V2.1 | length 405.6
  Top Layer w30: R45.1@5854.33,2192.91 V2.1@6059.06,2192.91 RG4.2@6059.06,2393.82
NetR54_1: R54.1 U1.30 | length 118.6
  Top Layer w9: R54.1@4751.97,4059.06 4757.87,4064.96 U1.30@4868.11,4064.96
NetR55_1: R55.1 U1.28 | length 117
  Top Layer w9: R55.1@4751.97,4102.36 4753.94,4104.33 U1.28@4868.11,4104.33
NetR56_1: R56.1 U1.18 | length 116.1
  Top Layer w9: R56.1@4751.97,4301.18 U1.18@4868.11,4301.18
NetR57_1: R57.1 U1.15 | length 208.7
  Top Layer w9: 4832.68,4360.24 4746.06,4360.24 U1.15@4868.11,4360.24
NetTP_6_1: TP_6.1 U16.8 | length 74.6
  Top Layer w30: U16.8@5023.62,2693.11 TP_6.1@5023.62,2767.72
NetTP_7_1: TP_7.1 U17.8 | length 70.7
  Top Layer w30: U17.8@5023.62,2393.9 TP_7.1@5023.62,2464.57
NU_1: P4.1 U12.17 | length 1382.8
  Top Layer w9: U12.17@6567.91,4509.84 6702.76,4509.84 6736.22,4543.31 6736.22,5448.82 P4.1@6944.88,5657.48
NU_2: P4.2 U12.19 | length 1398.2
  Top Layer w9: 6602.36,4547.24 6681.1,4547.24 6716.54,4582.68 6716.54,5529.13 P4.2@6944.88,5757.48
NU_3: P4.3 U12.20 | length 1498.3
  Top Layer w9: U12.20@6567.91,4568.9 6659.45,4568.9 6692.91,4602.36 6692.91,5605.51 P4.3@6944.88,5857.48
NU_4: P4.4 U12.22 | length 1547.4
  Top Layer w9: U12.22@6567.91,4608.27 6639.76,4608.27 6669.29,4637.8 6669.29,5681.89 P4.4@6944.88,5957.48
NU_5: P4.5 U12.23 | length 1607
  Top Layer w9: U12.23@6567.91,4627.95 6604.33,4627.95 6641.73,4665.35 6641.73,5754.33 P4.5@6944.88,6057.48
NU_FPGA_1: U1.145 U12.32 | length 282.6
  Top Layer w9: U1.145@6037.4,4419.29 6135.83,4419.29 6225.69,4509.16 6281.8,4509.16 U12.32@6282.48,4509.84
NU_FPGA_2: U1.146 U12.30 | length 290.7
  Top Layer w9: U1.146@6037.4,4438.98 6127.95,4438.98 6238.19,4549.21 U12.30@6282.48,4549.21
NU_FPGA_3: U1.147 U12.29 | length 290.7
  Top Layer w9: U1.147@6037.4,4458.66 6116.14,4458.66 6226.38,4568.9 U12.29@6282.48,4568.9
NU_FPGA_4: U1.150 U12.27 | length 282.6
  Top Layer w9: U1.150@6037.4,4517.72 6143.7,4517.72 6233.57,4607.58 6281.8,4607.58 U12.27@6282.48,4608.27
NU_FPGA_5: U1.151 U12.26 | length 282.6
  Top Layer w9: U1.151@6037.4,4537.4 6135.83,4537.4 6225.69,4627.27 6281.8,4627.27 U12.26@6282.48,4627.95
NU_SPI_1: P3.7 R6.2 R53.1 R56.2 | length 2168.7
  Top Layer w9: P3.7@4055.12,5685.04 4259.84,5685.04 4291.34,5653.54 4291.34,4594.53 4582.72,4303.15 R56.2@4700.79,4303.15
  Bottom Layer w9: R53.1@4204.72,5712.6 4082.68,5712.6 P3.7@4055.12,5685.04 4102.36,5637.8 R6.2@4204.84,5637.8
NU_SPI_2: P3.8 R5.2 R52.1 R57.2 | length 2277.2
  Top Layer w9: P3.8@4055.12,5822.83 4279.53,5822.83 4318.9,5783.46 4318.9,4593.84 4550.54,4362.2 R57.2@4696.85,4362.2
  Bottom Layer w9: R52.1@4204.72,5877.95 4110.24,5877.95 P3.8@4055.12,5822.83 4082.68,5795.28 R5.2@4204.84,5795.28
O\E\_LCD: R36.1 R37.1 R39.1 U1.127 | length 813
  Top Layer w9: U1.127@6037.4,4064.96 6198.82,4064.96 6228.35,4094.49 v1(6228.35,4129.92)
  Bottom Layer w9: v1(6228.35,4129.92) 6228.35,4562.99 6255.91,4590.55 R39.1@6358.27,4590.55
P0: U1.205 U9.40 | length 390
  Top Layer w9: U1.205@5011.25,4719.91 U1.205@5009.84,4718.5 5010.31,4718.97 5010.31,5035.6 5039.67,5064.96 U9.40@5068.9,5064.96
P1: U1.200 U9.41 | length 381.9
  Top Layer w9: U9.41@5068.9,5045.28 5046.85,5045.28 5037.68,5036.1 5037.68,4879.64 5108.27,4809.06 U1.200@5108.27,4718.5
P2: U1.199 U9.42 | length 331.5
  Top Layer w9: U9.42@5068.9,5025.59 5068.9,4879.92 5127.95,4820.87 U1.199@5127.95,4718.5
P3: U1.197 U9.43 | length 303.3
  Top Layer w9: U9.43@5100.39,4994.09 5100.39,4899.61 5167.32,4832.68 U1.197@5167.32,4718.5
R/W_FPGA_LCD: U1.129 U12.46 | length 322.4
  Top Layer w9: U1.129@6037.4,4104.33 6143.7,4104.33 6169.29,4129.92 6169.29,4169.98 6233.56,4234.25 U12.46@6282.48,4234.25
R/W_LCD: P5.5 U12.3 | length 423.9
  Top Layer w9: U12.3@6567.91,4234.25 6877.56,4234.25 P5.5@6956.69,4313.39 P5.5@6956.69,4311.02
REFA: C147.1 C148.1 C154.1 U6.3 U7.1 U16.6 | length 1119.2
  Top Layer w11.81: v1(5767.72,2850.39) 5780.51,2863.19 U6.3@5780.51,2941.93
  Bottom Layer w30: C147.1@5031.5,2590.55 5433.07,2992.13 5771.65,2992.13 5767.52,2987.99 U7.1@5767.52,2877.95
  other v1: 5031.5,2594.49
REFB: C151.1 C155.1 C156.1 U6.6 U7.3 U17.6 | length 1235.4
  Top Layer w11.81: U6.6@5857.28,2941.93 5857.28,2859.25 v1(5866.14,2850.39)
  Bottom Layer w30: v1(5027.56,2295.28) 5027.56,2362.2 5464.57,2799.21 5673.23,2799.21 5822.33,2799.21 5867.52,2844.4 U7.3@5867.52,2877.95
REFOUT: CH2.1 R33.1 U11.1 | length 414.4
  Top Layer w9: R33.1@5437.01,6259.84 CH2.1@5625.98,6259.84 U11.1@5625.98,6034.45
RS_FPGA_LCD: U1.128 U12.47 | length 334.3
  Top Layer w9: U1.128@6037.4,4084.65 6171.26,4084.65 6188.98,4102.36 6188.98,4162.8 6240.75,4214.57 U12.47@6282.48,4214.57
RS_LCD: P5.4 U12.2 | length 389.3
  Top Layer w9: U12.2@6567.91,4214.57 6955.51,4214.57 P5.4@6956.69,4213.39
RX232: J1.3 U3.8 | length 776.6
  Bottom Layer w20: v1(6555.12,3515.75) 6625.98,3515.75 6645.67,3496.06 6645.67,2968.5 6692.91,2921.26 6770.87,2921.26 J1.3@6774.8,2925.2
RX232_FPGA: U1.107 U3.9 | length 430.9
  Top Layer w9: U1.107@6037.4,3671.26 6139.76,3671.26 6173.23,3637.8 6173.23,3539.37 6195.4,3517.2 U3.9@6346.85,3517.2
SDATA_A: R15.2 U1.94 | length 164.3
  Top Layer w9: R15.2@5755.91,3385.71 5757.87,3387.68 U1.94@5757.87,3549.21
SDATA_B: R18.2 U1.98 | length 166
  Top Layer w9: R18.2@5830.71,3385.71 R18.2@5835.21,3390.21 ; U1.98@5835.21,3547.81 U1.98@5836.61,3549.21 ; R18.2@5836.61,3389.65 U1.98@5836.61,3547.24
SPI_R: P3.5 R47.2 U1.23 | length 1921.6
  Top Layer w9: P3.5@4055.12,5409.45 4200.79,5409.45 4232.28,5377.95 4232.28,4599.85 4629.38,4202.76 U1.23@4868.11,4202.76
  Bottom Layer w9: P3.5@4055.12,5409.45 4062.99,5401.57 R47.2@4204.84,5401.57
SPI_SCLK: P3.1 R51.2 U1.34 | length 1430.1
  Top Layer w9: P3.1@4055.12,4858.27 4055.12,4652.9 4721.8,3986.22 U1.34@4868.11,3986.22
  Bottom Layer w9: P3.1@4055.12,4858.27 4059.06,4862.2 4189.09,4862.2
SPI_W: P3.6 R46.2 U1.22 | length 2058.9
  Top Layer w9: P3.6@4055.12,5547.24 4062.99,5555.12 4224.41,5555.12 4255.91,5523.62 4255.91,4603.1 4636.56,4222.44 U1.22@4868.11,4222.44
  Bottom Layer w9: P3.6@4055.12,5547.24 4059.06,5551.18 R46.2@4204.84,5551.18
SS: P3.4 R48.2 U1.24 | length 1794.5
  Top Layer w9: P3.4@4055.12,5271.65 4181.1,5271.65 4208.66,5244.09 4208.66,4596.6 4622.19,4183.07 U1.24@4868.11,4183.07
  Bottom Layer w9: P3.4@4055.12,5271.65 4200.91,5271.65 R48.2@4204.84,5267.72
TCK_FPGA: P2.1 R8.1 U1.158 | length 1736.8
  Top Layer w9: U1.158@5935.04,4718.5 5935.04,4797.24 6169.29,5031.5 P2.1@6169.29,6251.97
  Bottom Layer w19.68: R8.1@6169.29,6145.67 P2.1@6169.29,6251.97
TDI_FPGA: P2.9 R11.1 U1.207 | length 2925.4
  Top Layer w9: v1(4933.07,4889.76) 4970.47,4848.69 U1.207@4970.47,4718.5
  GND w9: v1(4933.07,4889.76) 4933.07,5657.48 5350.39,6074.8 6531.5,6074.8 6566.93,6110.24 v1(6566.93,6153.54) v1@6566.93,6157.48
  Bottom Layer w19.68: R11.1@6566.93,6149.61 6569.29,6151.97 P2.9@6569.29,6251.97
TDO_FPGA: P2.3 R9.1 U1.157 | length 1766.8
  Top Layer w9: U1.157@5954.72,4718.5 5956.69,4720.47 5956.69,4787.4 6269.29,5100 P2.3@6269.29,6251.97
  Bottom Layer w19.68: R9.1@6267.72,6149.61 6269.29,6151.18 P2.3@6269.29,6251.97
TMS_FPGA: P2.5 R10.1 U1.155 | length 1912.9
  Top Layer w9: U1.155@6037.4,4616.14 6100.39,4616.14 6369.29,4885.04 P2.5@6369.29,6251.97
  Bottom Layer w19.68: P2.5@6369.29,6251.97 6369.29,6150.39 R10.1@6370.08,6149.61
TX232: J1.2 U3.7 | length 612.4
  Top Layer w20: U3.7@6551.57,3467.2 6623.35,3467.2 6669.29,3421.26 6669.29,3062.99 6698.03,3034.25 J1.2@6774.8,3034.25
TX232_FPGA: U1.106 U3.10 | length 497.3
  Top Layer w9: 6074.5,3650.17 6073.1,3651.57 U1.106@6037.4,3651.57 6104.33,3651.57 6141.73,3614.17 6141.73,3488.19 6162.72,3467.2 U3.10@6346.85,3467.2
VEE_LCD: P5.3 R41.3 | length 238.9
  Bottom Layer w19.68: R41.3@6759.84,4011.81 6861.42,4113.39 P5.3@6956.69,4113.39
pads on no net: "SW1. " J1.1 J1.4 J1.6 J1.7 J1.8 J1.9 J1.10 J1.11 P2.6 P2.7 P2.8 SW2.3 U1.2 U1.3 U1.4 U1.5 U1.6 U1.8 U1.9 U1.11 U1.12 U1.14 U1.16 U1.19 U1.20 U1.25 U1.26 U1.29 U1.31 U1.32 U1.33 U1.35 U1.36 U1.39 U1.40 U1.41 U1.42 U1.43 U1.45 U1.47 U1.48 U1.49 U1.50 U1.51 U1.54 U1.56 U1.57 U1.58 U1.60 U1.62 U1.63 U1.64 U1.65 U1.68 U1.69 U1.71 U1.72 U1.74 U1.75 U1.76 U1.77 U1.78 U1.80 U1.81 U1.82 U1.83 U1.84 U1.86 U1.89 U1.91 U1.93 U1.96 U1.97 U1.99 U1.101 U1.102 U1.108 U1.109 U1.110 U1.112 U1.113 U1.115 U1.116 U1.118 U1.119 U1.120 U1.122 U1.123 U1.124 U1.130 U1.136 U1.142 U1.148 U1.153 U1.154 U1.159 U1.161 U1.162 U1.163 U1.164 U1.165 U1.167 U1.168 U1.169 U1.171 U1.172 U1.174 U1.175 U1.177 U1.180 U1.181 U1.184 U1.185 U1.194 U1.202 U1.204 U3.11 U3.12 U3.13 U3.14 U5.7 U8.7 U9.1 U9.2 U9.57 U10.5 U11.5 U16.1 U16.3 U16.5 U16.7 U17.1 U17.3 U17.5 U17.7 Y1.1
copper on no net:
  other v3: 5157.48,5082.68 5204.72,5082.68 5251.97,5082.68 5299.21,5082.68 5157.48,5129.92 5204.72,5129.92 5251.97,5129.92 5299.21,5129.92 5157.48,5177.17 5204.72,5177.17 5251.97,5177.17 5299.21,5177.17 5157.48,5224.41 5204.72,5224.41 5251.97,5224.41 5299.21,5224.41
  other v4: 6952.76,2098.43 4074.8,2106.3 6948.82,6358.27 4074.8,6362.2

## Keep-outs
Keep-Out Layer:
  lines w7.87: 3976.38,6220.47 4133.86,6220.47 4212.6,6299.21 4212.6,6452.76 6811.02,6452.76 6811.02,6299.21 ; 4212.6,2007.87 6811.02,2007.87 ; 5716.54,3122.05 5771.65,3122.05 ; 7047.24,2244.09 7047.24,6220.47
  lines w10: 3976.38,6220.47 3976.38,2244.09 4133.86,2244.09 4212.6,2165.35 4212.6,2007.87 ; 6811.02,2007.87 6811.02,2165.35 6889.76,2244.09 7047.24,2244.09 ; 6811.02,6299.21 6889.76,6220.47 7047.24,6220.47 ; 4732.28,3122.05 4732.28,3122.05

## Silkscreen, mask and mechanical layers (free items; w line width, h text height)
Top Overlay:
  drawing of 895 lines, arcs and shapes, not listed
  text "16" at 6972.44,5492.13 h60 r90
  text "DESIGN FOR ADM,2013.3" at 6670,4889.76 h60 r90
  text "LCD" at 6874.02,4503.94 h60 r90
  text "1" at 6992.13,3811.02 h60 r90
  text "The size of PCB is masked in Mechanical 1 layer." at 3968.5,1787.4 h60
Bottom Overlay:
  lines w10: 5440.94,3779.53 5440.94,3755.91 5484.25,3712.6
Mechanical 1:
  lines w10: 3937.01,1968.5 3937.01,6496.06 7086.61,6496.06 7086.61,1968.5 3937.01,1968.5
Mechanical 2:
  lines w20: 4527.56,2011.81 4527.56,2917.32 4732.28,3122.05 5835.63,3122.05 ; 5838.58,3122.05 6291.34,3122.05 6496.06,2917.32 6496.06,2322.83 6496.06,2011.81

## Dimensions
7086.61,6496.06 to 3937.01,6496.06 on Top Overlay
7086.61,6496.06 to 7086.61,1968.5 on Top Overlay

## Text inside footprints (layer, text, board x,y; h text height)
J1: Top Overlay "5" at 6681.1,2685.04 h49.21 r90; Top Overlay "1" at 6688.98,3145.67 h49.21 r90; Bottom Overlay "6" at 6956.69,3110.24 h49.21 r270; Bottom Overlay "9" at 6956.69,2779.53 h49.21 r270
P2: Top Overlay "10" at 6803.15,6393.7 h49.21 r180; Top Overlay "9" at 6763.78,6275.59 h49.21 r180; Top Overlay "2" at 6023.62,6385.83 h49.21 r180; Top Overlay "1" at 6011.81,6271.65 h49.21 r180; Top Overlay "JTAG" at 6318.9,6106.3 h49.21 r180
P3: Top Overlay "8" at 4204.72,5830.71 h49.21 r270; Top Overlay "1" at 4271.65,4850.39 h49.21 r90